# Altium PCB RGB控制器.PcbDoc
Units mm, origin at the board's own origin, x right, y up, seen from the top; angles counter-clockwise.
Board outline 88.77 x 55.64 mm, 2 copper layers (Top Layer, Bottom Layer); 24 components, 0 nets, 210 pads, 6 vias.
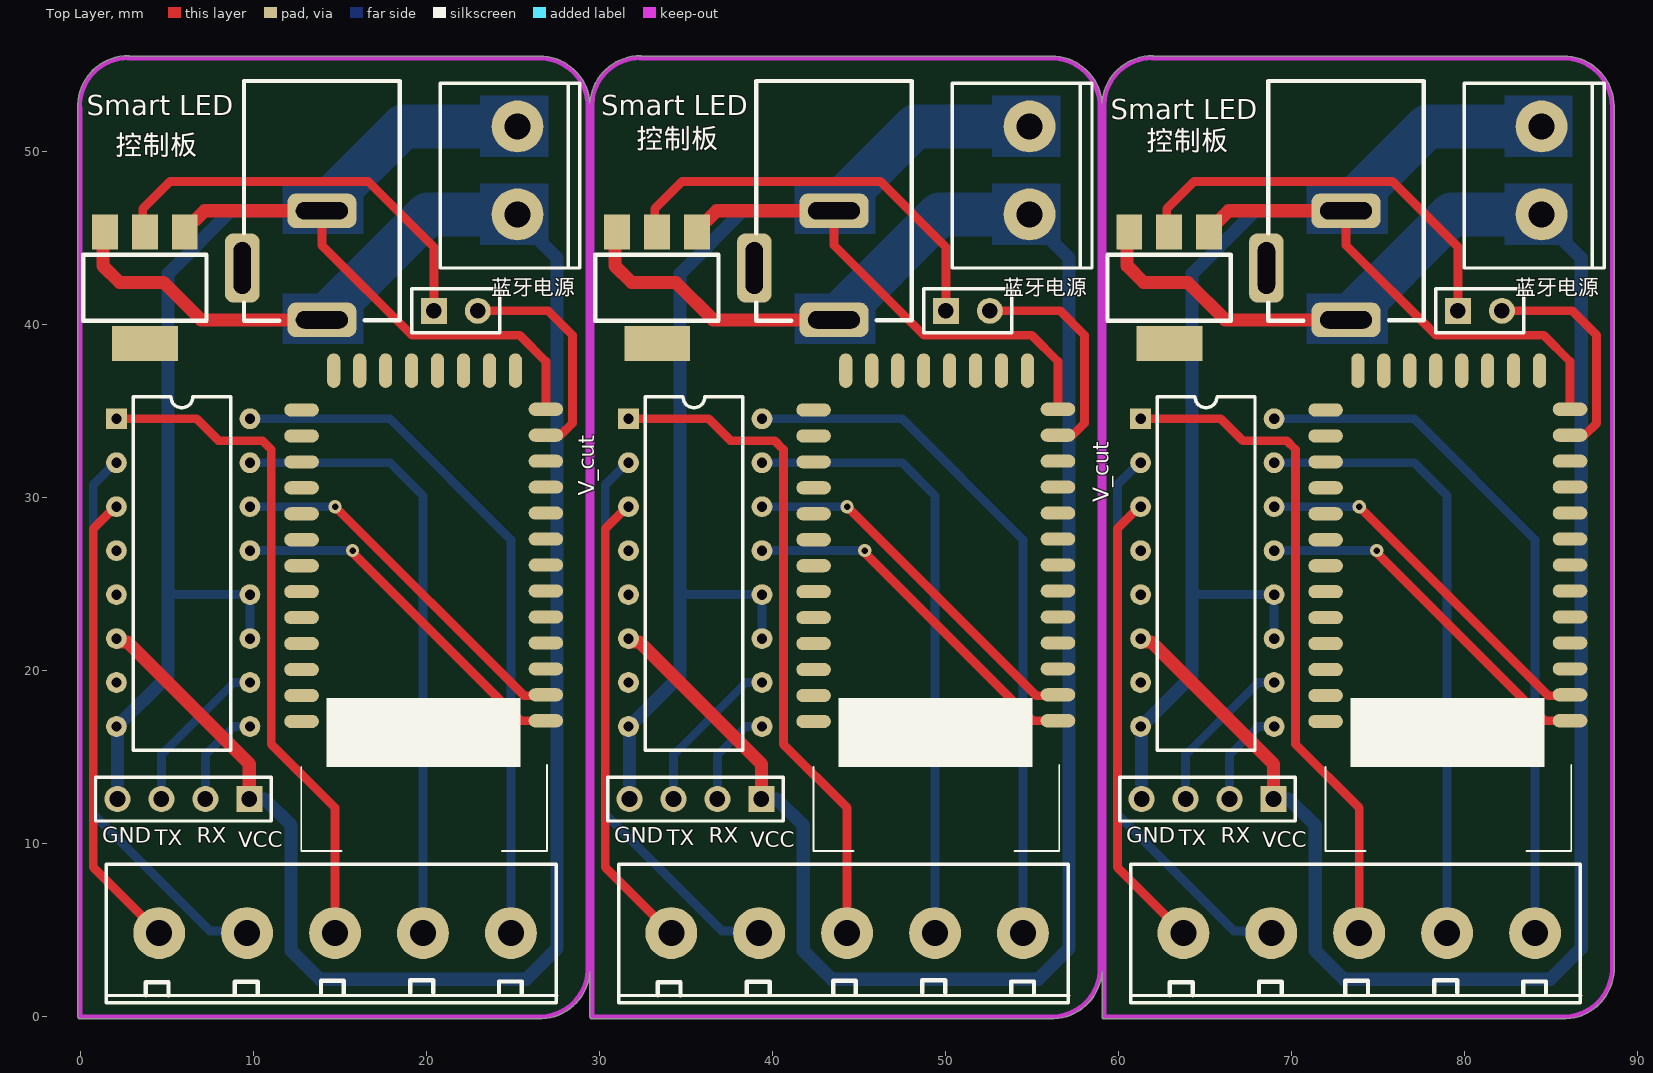
[diagram p0: Top Layer view]
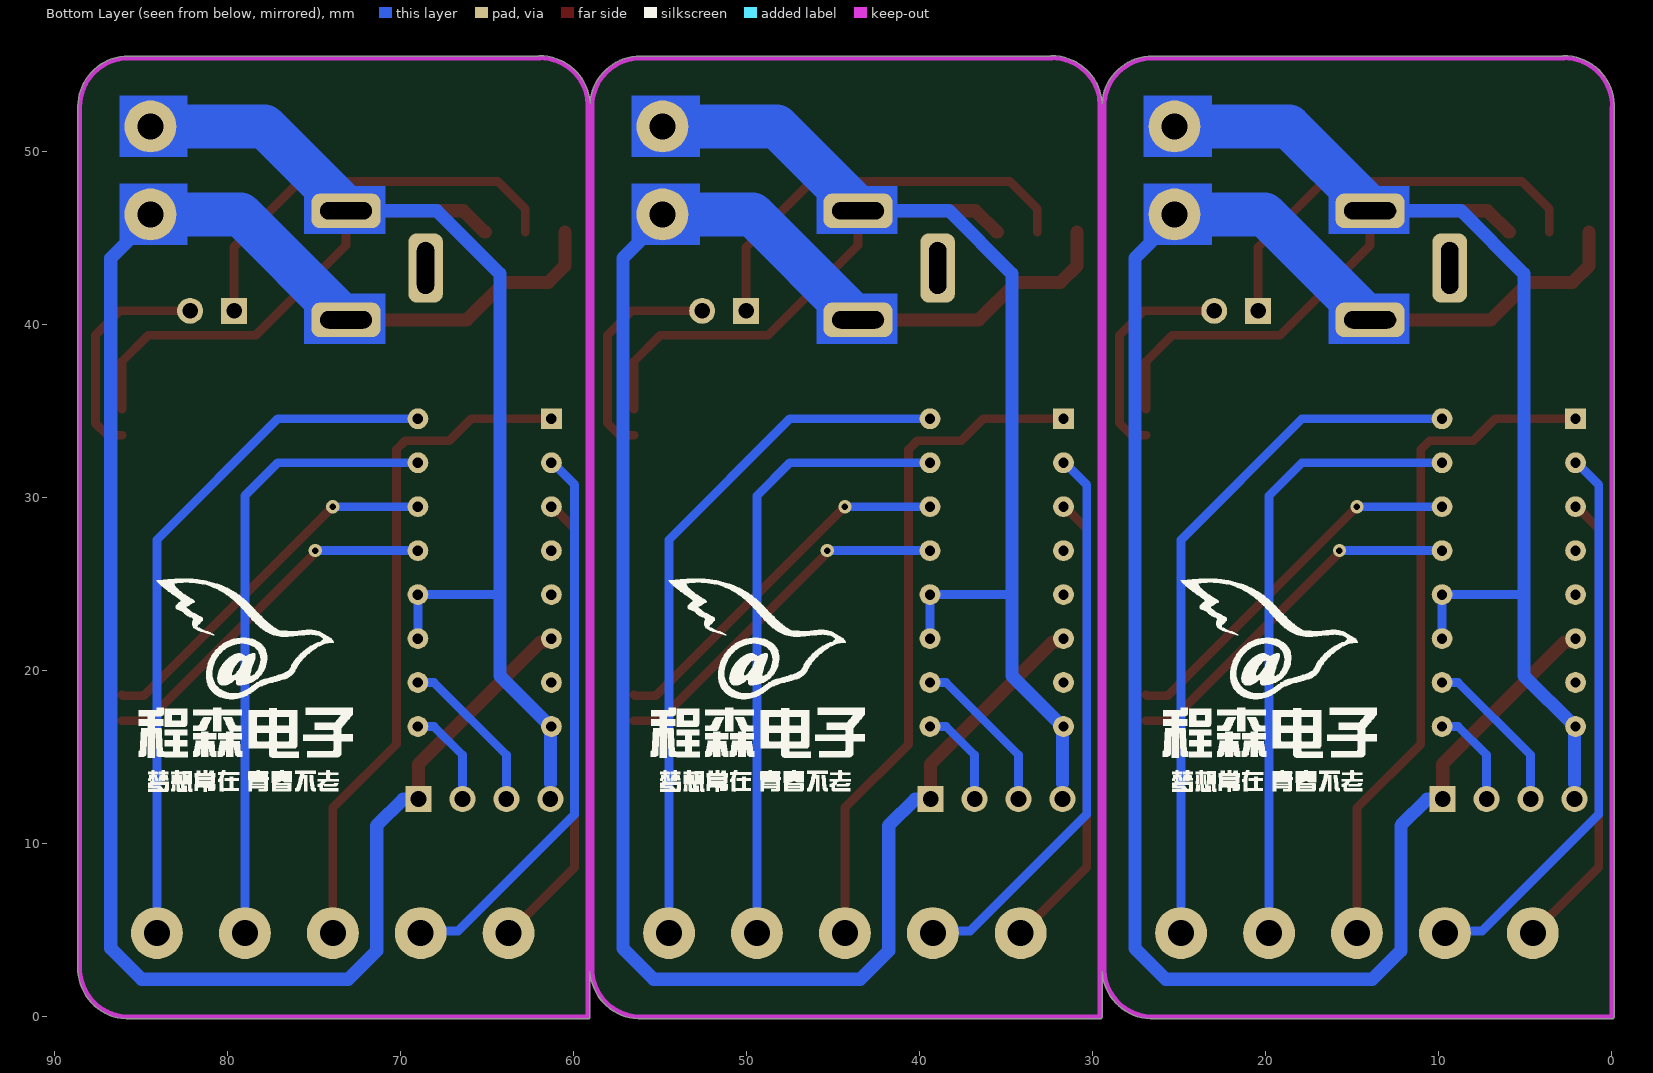
[diagram p1: Bottom Layer view, seen from below]

## Layer stack, top to bottom
Top Layer: signal copper 0.0356
Dielectric: dielectric 0.32, FR-4, Dk 4.8
Bottom Layer: signal copper 0.0356

## Board outline
0,-0.127 26.413,-0.127 ccw(c26.543,2.794) 29.46,2.583 29.46,0 ccw(c29.587,0) 29.587,-0.127 56,-0.127 ccw(c56.13,2.794) 59.047,2.583 59.047,0 ccw(c59.174,0) 59.174,-0.127 85.587,-0.127 ccw(c85.717,2.794) 88.638,2.661 ccw(c88.511,2.667) 88.638,2.667 ccw(c88.511,2.667) 88.638,2.667 88.638,52.578 ccw(c85.717,52.578) 85.717,55.499 62.028,55.499 ccw(c61.968,55.387) 61.97,55.514 ccw(c61.936,52.62) 59.045,52.768 ccw(c56.13,52.578) 56.13,55.499 32.441,55.499 ccw(c32.381,55.387) 32.383,55.514 ccw(c32.349,52.62) 29.458,52.768 ccw(c26.543,52.578) 26.543,55.499 2.854,55.499 ccw(c2.794,55.387) 2.796,55.514 ccw(c2.762,52.62) -0.127,52.447 -0.127,0 ccw(c0,0)

## Design rules (kind name [scope] priority, off if disabled: settings)
Clearance [All] p1 off: gap=0.254
PolygonConnect [All] p1: connectstyle=Relief reliefconductorwidth=0.254 reliefentries=4 polygonreliefangle="90 Angle" airgapwidth=0.254
RoutingVias [All] p1: holewidth=0.711 width=1.27 viastyle="Through Hole" minholewidth=0.711 minwidth=1.27 maxholewidth=0.711 maxwidth=1.27
ShortCircuit [All] p1 off: allowed=FALSE
SilkscreenOverComponentPads [All] p1: minsilkscreentomaskgap=0.254
SolderMaskExpansion [All] p1: expansion=0.102
UnRoutedNet [All] p1 off:
Width [All] p1: maxlimit=2.54 minlimit=0.254 preferedwidth=2.032
25 further rules are at their usual default settings.

## Components (designator, comment, footprint, x,y, rotation, side; value= is the part's Value field where it differs from the comment)
? "Comment" DC-6mm 13.97,40.259 r0 top locked
? "Comment" DIP16 0.381,34.544 r0 top locked
? "Comment" ble 1.524,27.432 r0 top locked
? "Comment" HDR1X4 9.779,12.573 r180 top locked
? "Comment" SOT-223 3.81,42.037 r180 top locked
? "Comment" HDR1X2 20.447,40.774 r0 top locked
? "Comment" 5PIN-5.08A 24.892,4.826 r180 top locked
? "Comment" 2PIN-5.08B 25.273,51.435 r270 top locked
? "Comment" DC-6mm 43.557,40.259 r0 top locked
? "Comment" DIP16 29.968,34.544 r0 top locked
? "Comment" ble 31.111,27.432 r0 top locked
? "Comment" HDR1X4 39.366,12.573 r180 top locked
? "Comment" SOT-223 33.397,42.037 r180 top locked
? "Comment" HDR1X2 50.034,40.774 r0 top locked
? "Comment" 5PIN-5.08A 54.479,4.826 r180 top locked
? "Comment" 2PIN-5.08B 54.86,51.435 r270 top locked
? "Comment" DC-6mm 73.144,40.259 r0 top locked
? "Comment" DIP16 59.555,34.544 r0 top locked
? "Comment" ble 60.698,27.432 r0 top locked
? "Comment" HDR1X4 68.953,12.573 r180 top locked
? "Comment" SOT-223 62.984,42.037 r180 top locked
? "Comment" HDR1X2 79.621,40.774 r0 top locked
? "Comment" 5PIN-5.08A 84.066,4.826 r180 top locked
? "Comment" 2PIN-5.08B 84.447,51.435 r270 top locked

## Footprints (in the part's own frame and the unit in brackets; to place one, negate y for a bottom-side part, rotate by r counter-clockwise, add the part's x,y. Pads: shape width x height; smd on the part's side, far side on the other; paste and mask are expansions set on the pad)
2PIN-5.08B [mm] "3A"
  round 3 hole 1.5: 1(0,0) 2(5.08,0)
  silkscreen extent -2.49,-4.47 8.18,3.61, body extent -2.48,-4.58 8.12,3.02, height 10
5PIN-5.08A [mm]
  round 3 hole 1.5: 1(0,0) 2(5.08,0) 3(10.16,0) 4(15.24,0) 5(20.32,0)
  silkscreen extent -2.64,-3.99 23.37,4.01, body extent -2.55,-3.96 23.42,4.14, height 10.2
ble [mm]
  oval 2x0.76 smd: 1(25.39,-10.338) 2(25.39,-8.838) 3(25.39,-7.338) 4(25.39,-5.838) 5(25.39,-4.338) 6(25.39,-2.838) 7(25.39,-1.338) 8(25.39,0.162) 9(25.39,1.662) 10(25.39,3.162) 11(25.39,4.662) 12(25.39,6.162) 13(25.39,7.662) 22(11.27,7.622) 23(11.27,6.122) 24(11.27,4.622) 25(11.27,3.122) 26(11.27,1.622) 27(11.27,0.122) 28(11.27,-1.378) 29(11.27,-2.878) 30(11.27,-4.378) 31(11.27,-5.878) 32(11.27,-7.378) 33(11.27,-8.878) 34(11.27,-10.378)
  oval 0.76x2 smd: 14(23.63,9.892) 15(22.13,9.892) 16(20.63,9.892) 17(19.13,9.892) 18(17.63,9.892) 19(16.13,9.892) 20(14.63,9.892) 21(13.13,9.892)
  silkscreen extent 11.26,-17.86 25.46,-9.01, body extent 11.84,-17.6 24.84,9.3, height 2.2
DC-6mm [mm]
  rrect50% 4x2 hole 1 slot 3 at 0 deg: 1(0,0) 2(0,6.3)
  rrect50% 2x4 hole 1 slot 3 at 90 deg: 3(-4.6,3)
  silkscreen extent -4.5,-0.04 4.5,13.8, body extent -5,-0.04 4.5,13.78, height 11.02
DIP16 [mm]
  rect 1.2x1.2 hole 0.6: 1(1.719,0)
  round 1.2 hole 0.6: 2(1.719,-2.54) 3(1.719,-5.08) 4(1.719,-7.62) 5(1.719,-10.16) 6(1.719,-12.7) 7(1.719,-15.24) 8(1.719,-17.78) 9(9.433,-17.78) 10(9.433,-15.24) 11(9.433,-12.7) 12(9.433,-10.16) 13(9.433,-7.62) 14(9.433,-5.08) 15(9.433,-2.54) 16(9.433,0)
  silkscreen extent 2.69,-19.15 8.33,1.27, body extent 1.55,-18.92 9.42,1.08, height 5.08
HDR1X2 [mm]
  rect 1.5x1.5 hole 0.9: 1(-0.01,0.007)
  round 1.5 hole 0.9: 2(2.53,0.007)
  silkscreen extent -1.28,-1.26 3.8,1.28, body extent -1.28,-1.26 3.8,1.28, height 8.41
HDR1X4 [mm] "Connector; Header; 4 Position"
  rect 1.5x1.5 hole 0.9: 1(0,0)
  round 1.5 hole 0.9: 2(2.54,0) 3(5.08,0) 4(7.62,0)
  silkscreen extent -1.27,-1.27 8.89,1.27, body extent -1.26,-1.27 8.9,1.27, height 8.54
SOT-223 [mil]
  rect 59x79 smd: 1(-88,-130) 2(2.55,-130) 3(93.1,-130)
  rect 150x79 smd: 2(1.88,123.54)
  silkscreen extent -137,-78 143,72, body extent -126,-139 130,135, height 67

## Via types
v1: diameter 0.762, hole 0.381, Top Layer to Bottom Layer, 6 vias

## Nets (pads, with @x,y where several pads share a name; then routed paths per layer and width w, separated by ;. In a path a pad name is that pad's centre, name@x,y a point inside that pad or via, vN(x,y) a via of type N, cw(c..) or ccw(c..) an arc to the next point about the centre after c; other vN are vias at no path point)
pads on no net: ?.1 ?.2 ?.3 ?.4 ?.5 ?.6 ?.7 ?.8 ?.9 ?.10 ?.11 ?.12 ?.13 ?.14 ?.15 ?.16 ?.17 ?.18 ?.19 ?.20 ?.21 ?.22 ?.23 ?.24 ?.25 ?.26 ?.27 ?.28 ?.29 ?.30 ?.31 ?.32 ?.33 ?.34
copper on no net: | length 1422.7
  Top Layer w0.508: 2.1,29.464 2.032,29.464 0.762,28.194 0.762,8.636 4.572,4.826 ; 2.1,34.544 6.731,34.544 8.001,33.274 10.541,33.274 11.049,32.766 11.049,15.748 14.732,12.065 14.732,4.826 ; 3.618,45.339 3.618,46.671 5.207,48.26 16.637,48.26 20.447,44.45 20.447,40.774 ; 13.97,46.559 13.97,44.577 19.177,39.37 23.495,39.37 25.4,39.37 26.914,37.856 26.914,35.094 ; v1(14.732,29.464) 25.654,18.542 26.862,18.542 ; v1(15.748,26.924) 15.748,26.797 25.451,17.094 26.914,17.094 ; 22.977,40.782 27.036,40.782 28.448,39.37 28.448,34.29 27.752,33.594 26.914,33.594 ; 26.162,18.542 26.862,18.542 ; 26.914,18.594 26.862,18.542 ; 31.687,29.464 31.619,29.464 30.349,28.194 30.349,8.636 34.159,4.826 ; 31.687,34.544 36.318,34.544 37.588,33.274 40.128,33.274 40.636,32.766 40.636,15.748 44.319,12.065 44.319,4.826 ; 33.205,45.339 33.205,46.671 34.794,48.26 46.224,48.26 50.034,44.45 50.034,40.774 ; 43.557,46.559 43.557,44.577 48.764,39.37 53.082,39.37 54.987,39.37 56.501,37.856 56.501,35.094 ; v1(44.319,29.464) 55.241,18.542 56.449,18.542 ; v1(45.335,26.924) 45.335,26.797 55.038,17.094 56.501,17.094 ; 52.564,40.782 56.623,40.782 58.035,39.37 58.035,34.29 57.339,33.594 56.501,33.594 ; 55.749,18.542 56.449,18.542 ; 56.501,18.594 56.449,18.542 ; 61.274,29.464 61.206,29.464 59.936,28.194 59.936,8.636 63.746,4.826 ; 61.274,34.544 65.905,34.544 67.175,33.274 69.715,33.274 70.223,32.766 70.223,15.748 73.906,12.065 73.906,4.826 ; 62.792,45.339 62.792,46.671 64.381,48.26 75.811,48.26 79.621,44.45 79.621,40.774 ; 73.144,46.559 73.144,44.577 78.351,39.37 82.669,39.37 84.574,39.37 86.088,37.856 86.088,35.094 ; v1(73.906,29.464) 84.828,18.542 86.036,18.542 ; v1(74.922,26.924) 74.922,26.797 84.625,17.094 86.088,17.094 ; 82.151,40.782 86.21,40.782 87.622,39.37 87.622,34.29 86.926,33.594 86.088,33.594 ; 85.336,18.542 86.036,18.542 ; 86.088,18.594 86.036,18.542
  Top Layer w0.762: 1.318,45.339 1.318,43.386 2.286,42.418 4.826,42.418 6.985,40.259 13.97,40.259 ; 2.095,21.653 2.73,21.653 9.779,14.605 9.779,12.573 ; 5.918,45.339 5.969,45.339 7.189,46.559 13.97,46.559 ; 30.905,45.339 30.905,43.386 31.873,42.418 34.413,42.418 36.572,40.259 43.557,40.259 ; 31.682,21.653 32.317,21.653 39.366,14.605 39.366,12.573 ; 35.505,45.339 35.556,45.339 36.776,46.559 43.557,46.559 ; 60.492,45.339 60.492,43.386 61.46,42.418 64,42.418 66.159,40.259 73.144,40.259 ; 61.269,21.653 61.904,21.653 68.953,14.605 68.953,12.573 ; 65.092,45.339 65.143,45.339 66.363,46.559 73.144,46.559
  Bottom Layer w0.508: 2.1,13.521 2.159,13.462 ; 2.1,32.004 2.032,32.004 0.762,30.734 0.762,11.684 7.493,4.953 9.525,4.953 ; 4.699,12.573 4.699,15.113 8.89,19.304 9.814,19.304 ; 5.08,24.384 9.814,24.384 9.814,21.844 ; 7.239,12.573 7.239,15.113 8.89,16.764 9.814,16.764 ; 9.814,26.924 v1(15.748,26.924) ; 9.814,29.464 v1(14.732,29.464) ; 9.814,32.004 17.907,32.004 19.812,30.099 19.812,4.826 ; 9.814,34.544 17.907,34.544 24.892,27.559 24.892,4.826 ; 31.687,13.521 31.746,13.462 ; 31.687,32.004 31.619,32.004 30.349,30.734 30.349,11.684 37.08,4.953 39.112,4.953 ; 34.286,12.573 34.286,15.113 38.477,19.304 39.401,19.304 ; 34.667,24.384 39.401,24.384 39.401,21.844 ; 36.826,12.573 36.826,15.113 38.477,16.764 39.401,16.764 ; 39.401,26.924 v1(45.335,26.924) ; 39.401,29.464 v1(44.319,29.464) ; 39.401,32.004 47.494,32.004 49.399,30.099 49.399,4.826 ; 39.401,34.544 47.494,34.544 54.479,27.559 54.479,4.826 ; 61.274,13.521 61.333,13.462 ; 61.274,32.004 61.206,32.004 59.936,30.734 59.936,11.684 66.667,4.953 68.699,4.953 ; 63.873,12.573 63.873,15.113 68.064,19.304 68.988,19.304 ; 64.254,24.384 68.988,24.384 68.988,21.844 ; 66.413,12.573 66.413,15.113 68.064,16.764 68.988,16.764 ; 68.988,26.924 v1(74.922,26.924) ; 68.988,29.464 v1(73.906,29.464) ; 68.988,32.004 77.081,32.004 78.986,30.099 78.986,4.826 ; 68.988,34.544 77.081,34.544 84.066,27.559 84.066,4.826
  Bottom Layer w0.762: 2.159,13.462 2.159,16.705 2.1,16.764 2.159,16.764 5.08,19.685 5.08,42.926 8.713,46.559 13.97,46.559 ; 9.779,12.573 10.668,12.573 12.192,11.049 12.192,3.81 13.843,2.159 25.781,2.159 27.559,3.937 27.559,43.815 25.273,46.101 25.273,46.355 ; 31.746,13.462 31.746,16.705 31.687,16.764 31.746,16.764 34.667,19.685 34.667,42.926 38.3,46.559 43.557,46.559 ; 39.366,12.573 40.255,12.573 41.779,11.049 41.779,3.81 43.43,2.159 55.368,2.159 57.146,3.937 57.146,43.815 54.86,46.101 54.86,46.355 ; 61.333,13.462 61.333,16.705 61.274,16.764 61.333,16.764 64.254,19.685 64.254,42.926 67.887,46.559 73.144,46.559 ; 68.953,12.573 69.842,12.573 71.366,11.049 71.366,3.81 73.017,2.159 84.955,2.159 86.733,3.937 86.733,43.815 84.447,46.101 84.447,46.355
  Bottom Layer w2.54: 14.097,40.386 20.066,46.355 25.273,46.355 ; 14.097,46.863 18.669,51.435 25.273,51.435 ; 43.684,40.386 49.653,46.355 54.86,46.355 ; 43.684,46.863 48.256,51.435 54.86,51.435 ; 73.271,40.386 79.24,46.355 84.447,46.355 ; 73.271,46.863 77.843,51.435 84.447,51.435

## Keep-outs
Keep-Out Layer:
  lines w0.254: 2.762,55.372 26.543,55.372 cw(c26.543,52.578) 29.337,52.578 29.337,2.667 cw(c26.543,2.794) 26.416,0 0,0 0,3.048 0,52.451 cw(c2.762,52.62) 2.794,55.387 ; 32.349,55.372 56.13,55.372 cw(c56.13,52.578) 58.924,52.578 58.924,2.667 cw(c56.13,2.794) 56.003,0 29.587,0 29.587,3.048 29.587,52.451 cw(c32.349,52.62) 32.381,55.387 ; 61.936,55.372 85.717,55.372 cw(c85.717,52.578) 88.511,52.578 88.511,2.667 cw(c85.717,2.794) 85.59,0 59.174,0 59.174,3.048 59.174,52.451 cw(c61.936,52.62) 61.968,55.387

## Other copper
Bottom Layer:
  rectangle: 11.684,45.212 16.383,48.006
  rectangle: 11.684,38.862 16.383,41.783
  rectangle: 23.114,44.577 27.051,48.133
  rectangle: 23.114,49.657 27.051,53.213
  rectangle: 41.271,45.212 45.97,48.006
  rectangle: 41.271,38.862 45.97,41.783
  rectangle: 52.701,44.577 56.638,48.133
  rectangle: 52.701,49.657 56.638,53.213
  rectangle: 70.858,45.212 75.557,48.006
  rectangle: 70.858,38.862 75.557,41.783
  rectangle: 82.288,44.577 86.225,48.133
  rectangle: 82.288,49.657 86.225,53.213

## Silkscreen, mask and mechanical layers (free items; w line width, h text height)
Top Overlay:
  text "Smart LED" at 0.381,51.689 h2
  text "Smart LED" at 30.099,51.689 h2
  text "Smart LED" at 59.563,51.435 h2
  text "控制板" at 32.127,49.784 h2
  text "控制板" at 61.595,49.657 h2
  text "控制板" at 2.032,49.403 h2
  text "蓝牙电源" at 23.749,41.402 h1.52
  text "蓝牙电源" at 53.336,41.402 h1.52
  text "蓝牙电源" at 82.923,41.402 h1.52
  text "V_cut" at 29.718,30.099 h0.92 r90
  text "V_cut" at 59.44,29.718 h0.92 r90
  text "GND" at 1.27,10.033 h0.9
  text "RX" at 6.731,10.033 h0.9
  text "GND" at 30.857,10.033 h0.9
  text "RX" at 36.318,10.033 h0.9
  text "GND" at 60.444,10.033 h0.9
  text "RX" at 65.905,10.033 h0.9
  text "TX" at 4.318,9.906 h0.9
  text "TX" at 33.905,9.906 h0.9
  text "TX" at 63.492,9.906 h0.9
  text "VCC" at 9.144,9.779 h0.9
  text "VCC" at 38.731,9.779 h0.9
  text "VCC" at 68.318,9.779 h0.9
Bottom Overlay:
  drawing of 7290 lines, arcs and shapes, not listed
Bottom Solder:
  lines w0.508: 13.335,47.244 18.288,52.197 24.384,52.197 ; 13.652,41.084 19.685,47.117 25.273,47.117 ; 14.351,47.117 18.669,51.435 24.765,51.435 ; 14.668,40.957 20.066,46.355 25.273,46.355 ; 14.859,46.228 14.859,46.482 19.05,50.673 25.146,50.673 25.273,50.546 ; 15.621,40.767 20.447,45.593 25.273,45.593 ; 42.922,47.244 47.875,52.197 53.971,52.197 ; 43.239,41.084 49.272,47.117 54.86,47.117 ; 43.938,47.117 48.256,51.435 54.352,51.435 ; 44.255,40.957 49.653,46.355 54.86,46.355 ; 44.446,46.228 44.446,46.482 48.637,50.673 54.733,50.673 54.86,50.546 ; 45.208,40.767 50.034,45.593 54.86,45.593 ; 72.509,47.244 77.462,52.197 83.558,52.197 ; 72.826,41.084 78.859,47.117 84.447,47.117 ; 73.525,47.117 77.843,51.435 83.939,51.435 ; 73.842,40.957 79.24,46.355 84.447,46.355 ; 74.033,46.228 74.033,46.482 78.224,50.673 84.32,50.673 84.447,50.546 ; 74.795,40.767 79.621,45.593 84.447,45.593